# Altium PCB Copy of PCB.PcbDoc
Units mil, origin at the board's own origin, x right, y up, seen from the top; angles counter-clockwise.
Board outline 6000 x 4000 mil, 2 copper layers (Top Layer, Bottom Layer); 11 components, 7 nets, 36 pads, 0 vias.
Unrouted connection lines stored in the file: 27.
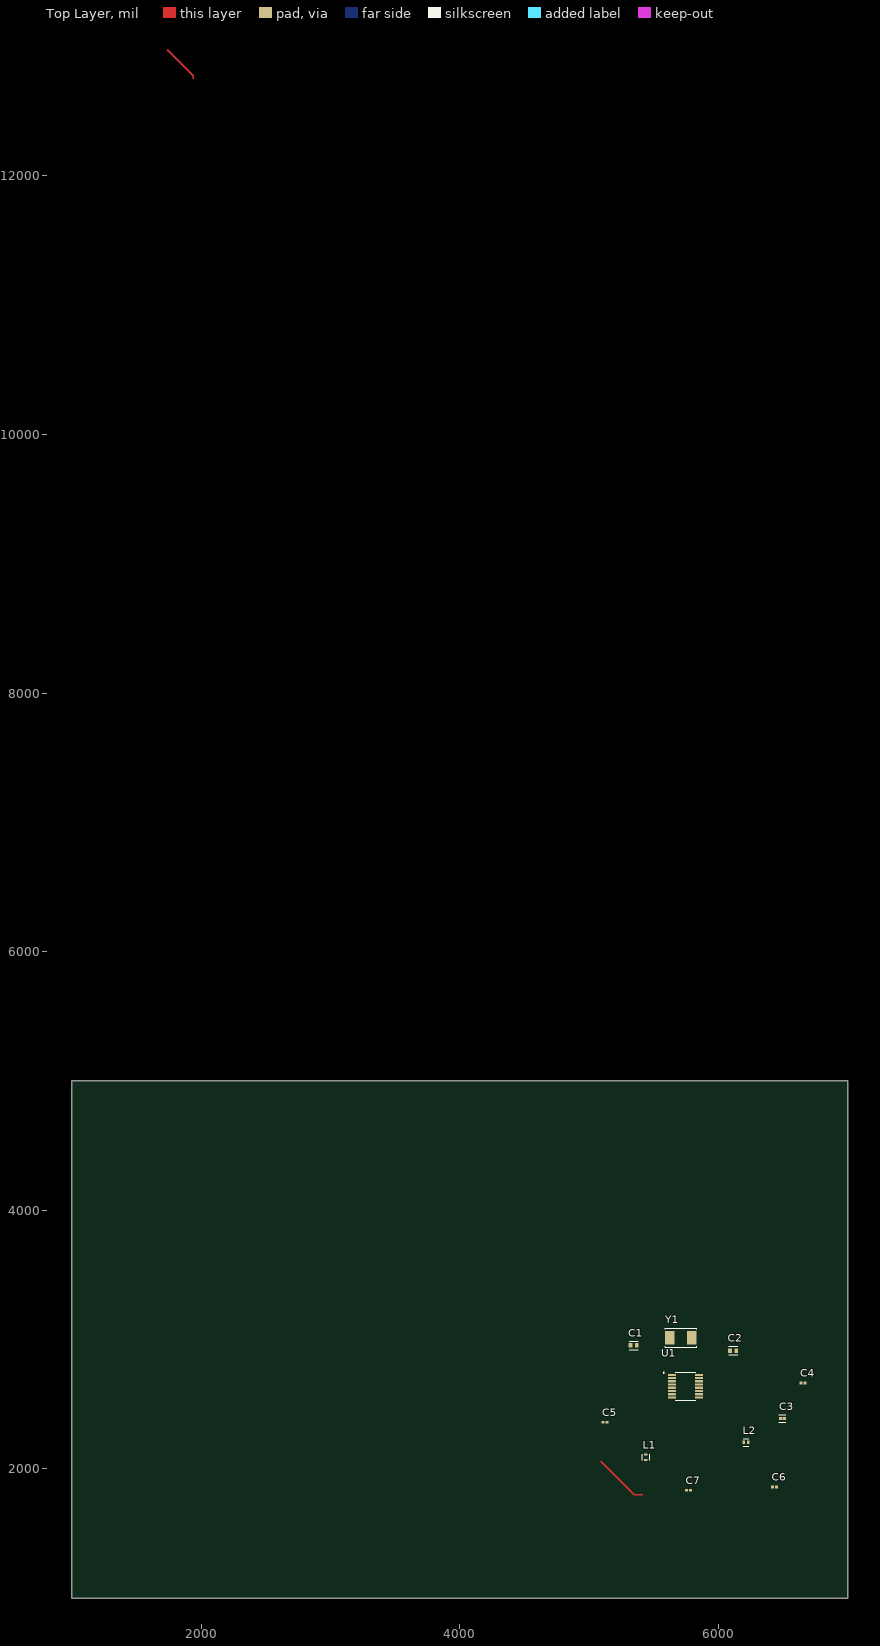
[diagram p0: Top Layer view]
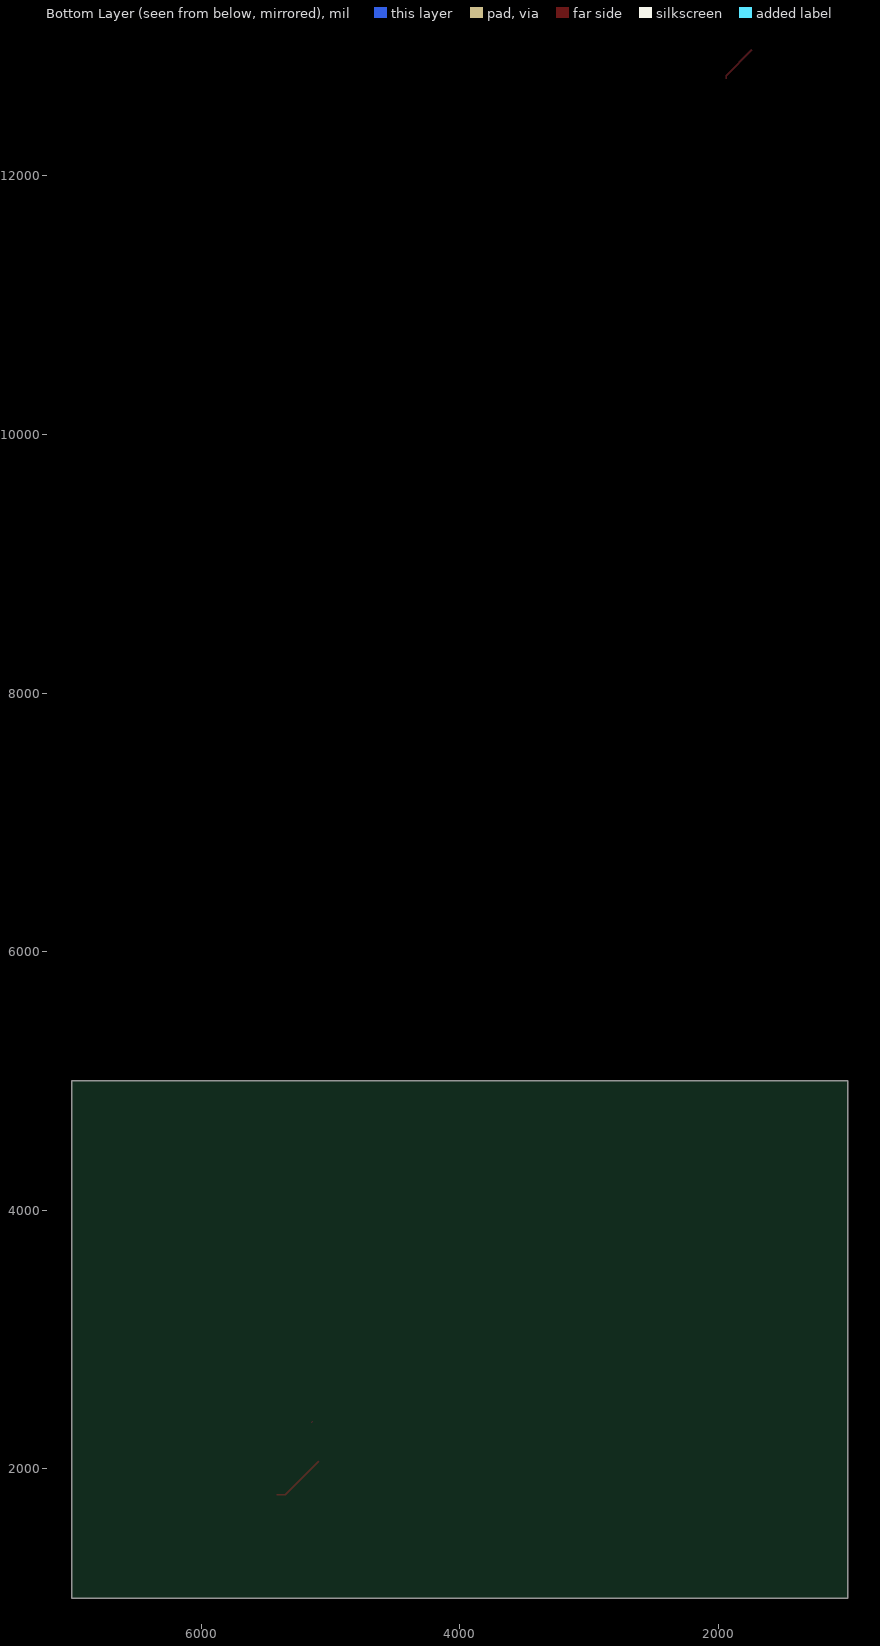
[diagram p1: Bottom Layer view, seen from below]

## Layer stack, top to bottom
Top Solder: solder mask 0.4, Solder Resist, Dk 3.5
Top Layer: signal copper 1.4
Dielectric 1: dielectric 12.6, FR-4, Dk 4.8
Bottom Layer: signal copper 1.4
Bottom Solder: solder mask 0.4, Solder Resist, Dk 3.5

## Board outline
1000,1000 7000,1000 7000,5000 1000,5000

## Design rules (kind name [scope] priority, off if disabled: settings)
Clearance [All] p1: gap=10 ignorepadtopadclearanceinfootprint=FALSE except(0: Arc-Hole Track-Hole SMDPad-Hole THPad-Hole Via-Hole Fill-Hole Poly-Hole Region-Hole Text-Hole)
PolygonConnect [All] p1: connectstyle=Relief reliefconductorwidth=10 reliefentries=4 polygonreliefangle="90 Angle" airgapwidth=10
RoomDefinition DaughterBoard [InComponentClass('DaughterBoard')] p1: confinementstyle=ConfineIn formatcopy=TRUE lockcomponents=FALSE outline 0,0 2000,0 2000,1000 0,1000
RoutingVias [All] p1: holewidth=28 width=50 viastyle="Through Hole" minholewidth=28 minwidth=50 maxholewidth=28 maxwidth=50
SolderMaskExpansion [All] p1: expansion=4 istentingtop=FALSE
Width [All] p1: maxlimit=10 minlimit=10 preferedwidth=10
30 further rules are at their usual default settings.

## Classes and differential pairs
net class ANT: ANT

## Components (designator, comment, footprint, x,y, rotation, side; value= is the part's Value field where it differs from the comment)
C1 "10pF" FP-C0603C-CF-MFG 5345,2955 r0 top value="10 pF"
C2 "10pF" FP-C0603C-CF-MFG 6115,2915 r0 top value="10 pF"
C3 "4.7uF" FP-C1005-050-0_15-IPC_C 6494.86,2390 r0 top
C4 "0.1uF" CAPC1005X56X25LL10T15 6655.35,2665 r0 top
C5 "0.1uF" CAPC1005X56X25LL10T15 5125,2360 r0 top
C6 "1.2pF" CAPC1005X55X25LL05T10 6434.65,1860 r0 top
C7 "1.2pF" CAPC1005X55X25LL05T10 5770.12,1835 r0 top
L1 "39nH" FP-LQW15AN_80-MFG 5440,2090 r90 top
L2 "77nH" FP-LQW15CN_10-MFG 6215,2205 r0 top
U1 "MICRF220AYQS" SOP63P600X175-16N 5745.12,2640 r0 top
Y1 "9.81563MHz" FP-ABM7-MFG 5710,3015 r0 top

## Footprints (in the part's own frame and the unit in brackets; to place one, negate y for a bottom-side part, rotate by r counter-clockwise, add the part's x,y. Pads: shape width x height; smd on the part's side, far side on the other; paste and mask are expansions set on the pad)
CAPC1005X55X25LL05T10 [mm] "Chip Capacitor, 2-Leads, Body 1.00x0.50mm, IPC High Density"
  rect 0.56x0.52 smd: 1(-0.39,0) 2(0.39,0)
  body extent -0.53,-0.28 0.53,0.28, height 0.55
CAPC1005X56X25LL10T15 [mm] "Chip Capacitor, 2-Leads, Body 1.00x0.50mm, IPC High Density"
  rect 0.58x0.54 smd: 1(-0.39,0) 2(0.39,0)
  body extent -0.55,-0.3 0.55,0.3, height 0.56
FP-ABM7-MFG [mm]
  rect 1.9x2.6 smd paste+0 mask+0: 1(-2.15,0) 2(2.15,0)
  silkscreen extent -3.1,-1.85 3.1,1.85, body extent -3.2,-1.95 3.2,1.95, height 0.25
FP-C0603C-CF-MFG [mm]
  rect 0.75x0.9 smd paste+0 mask+0: 1(-0.6,0) 2(0.6,0)
  silkscreen extent -0.87,-0.85 0.88,0.85, body extent -1.2,-0.6 1.2,0.6, height 0.25
FP-C1005-050-0_15-IPC_C [mil]
  rect 23.82x22.04 smd paste+0 mask+0: 1(-14.86,0) 2(14.86,0)
  silkscreen extent -27,-29 27,29, body extent -31,-17 31,17, height 10
FP-LQW15AN_80-MFG [mm]
  rect 0.41x0.66 smd paste+0 mask+0: 1(-0.505,0) 2(0.505,0)
  silkscreen extent -0.56,-0.74 0.55,0.75, body extent -0.81,-0.45 0.81,0.45, height 0.25
FP-LQW15CN_10-MFG [mm]
  rect 0.5x0.66 smd paste+0 mask+0: 1(-0.45,0) 2(0.45,0)
  silkscreen extent -0.55,-0.75 0.55,0.75, body extent -0.8,-0.43 0.8,0.43, height 0.25
SOP63P600X175-16N [mm]
  rrect25% 1.57x0.41 smd: 1(-2.67,2.222) 2(-2.67,1.587) 3(-2.67,0.953) 4(-2.67,0.318) 5(-2.67,-0.318) 6(-2.67,-0.953) 7(-2.67,-1.587) 8(-2.67,-2.222) 9(2.67,-2.222) 10(2.67,-1.587) 11(2.67,-0.953) 12(2.67,-0.318) 13(2.67,0.318) 14(2.67,0.953) 15(2.67,1.587) 16(2.67,2.222)
  silkscreen extent -4.34,-2.75 2,2.75, body extent -5,-5 5,5, height 142

## Part data
C1 C2: library part CMP-1035-00555-3, "CAP CER 10PF 50V NP0 0603", Capacitance="10 pF", Manufacturer=KEMET, Manufacturer Part Number=C0603C100D5GACTU, Package=C0603C-CF, Temperature="-55°C to +125°C", Temperature Characteristic=C0G, Temperature Coefficient=30ppm/°C, Temperature Range High=+125°C, Temperature Range Low=-55°C, Tolerance="0.5 pF", Voltage Rating="50 V", Automotive=Yes, Automotive Grade="Grade 1", Category=Cap, ComponentLink2Description=Datasheet, ComponentLink2URL=https://api.kemet.com/component-edge/download/datasheet/C0603C100J5GACAUTO.pdf, Device Class L1="Passive Components", Device Class L2=Capacitors, Device Class L3="Ceramic Capacitors", Digikey Description="CAP CER 10PF 50V NP0 0603", Height=0.87mm, Lead Free=Yes, Material=Ceramic, Mouser Description="Multilayer Ceramic Capacitors MLCC - SMD/SMT 50volts 10pF C0G 0.5%", Octopart=https://octopart.com/c0603c100d5gactu-kemet-9143648, RoHS=TRUE
C3: library part CMP-08246-005457-1, "CAP CER 4.7UF 6.3V X5R 0402", Case Code (Imperial)=0402, Case Code (Metric)=1005, Dielectric=X5R, Dielectric Material=Ceramic, Max Operating Temperature=85°C, Min Operating Temperature=-55°C, Package Quantity=1, Tolerance=20%, Voltage=6.3V, Capacitance=4.7uF, Case/Package=0402, Construction=Flat, Depth=0.5mm, Dissipation Factor=10%, Height=0.5mm, Lead Free="Lead Free", Length=1mm, Mount="Surface Mount", Packaging="Tape and Reel", Radiation Hardening=No, REACH SVHC="No SVHC", Resistor Type=Ceramic, Series=C, Termination=SMD/SMT, Thickness=0.026inch, Voltage Rating=6.3V, Voltage Rating (DC)=6.3V, Weight=2.3E-05oz, Width=0.02inch
C4 C5: library part CMP-2008-02743-1, Manufacturer="AVX Interconnect / Elco", Part Number=04026D104KAT2A
C6 C7: library part CMP-1034-00083-2, Manufacturer=Murata, Part Number=GRM1555C1H1R2WA01D
L1: library part CMP-06042-001660-1, "Wire Wound RF Inductor 39nH ±5% 530mA 0.456Ω 0402 (1005)", Case Code (Imperial)=0402, Case Code (Metric)=1005, Current Rating=530mA, DC Resistance (DCR)=456mR, Max Operating Temperature=125°C, Min Operating Temperature=-55°C, Package Quantity=1, Resistor Type=Wirewound, Self Resonant Frequency=3.4GHz, Test Frequency=100MHz, Tolerance=5%, Case/Package=0402, Core Material=Non-Magnetic, Height=0.5mm, Height - Seated (Max)=0.024inch, Inductance=39nH, Length=0.039inch, Max DC Current=530mA, Mount="Surface Mount", Packaging="Tape and Reel", Q Factor=28, Shielding=Unshielded, Termination=SMD/SMT, Width=0.024inch
L2: library part CMP-06042-006679-1, "Wire Wound Ferrite RF Inductor For Automotive 77nH ±5% 1100mA 0.09Ω 0402 (1005)", Case Code (Imperial)=0402, Case Code (Metric)=1005, Current Rating=1.1A, DC Resistance (DCR)=90mR, Max Operating Temperature=125°C, Min Operating Temperature=-40°C, Ratings=AEC-Q200, Resistor Type=Wirewound, Self Resonant Frequency=2GHz, Test Frequency=100MHz, Tolerance=5%, Case/Package=0402, Core Material=Ferrite, Height - Seated (Max)=0.024inch, Inductance=77nH, Length=0.039inch, Mount="Surface Mount", Packaging="Tape and Reel", Shielding=Unshielded, Width=0.02inch
U1: "No Description Available", Mfr_Name=Microchip, Copyright="Copyright (C) 2022 Ultra Librarian. All rights reserved.", Manufacturer_Part_Number=MICRF220AYQS, RefDes=RefDes, Type=DEV
Y1: library part CMP-27762-013605-1, "Crystal 9.81563MHz ±30ppm 10pF SMD-2 6mm x 3.5mm", Case/Package=SMD/SMT, ESR (Equivalent Series Resistance)=50R, Frequency Stability=100ppm, Frequency Tolerance=30ppm, Load Capacitance=10pF, Max Operating Temperature=85°C, Min Operating Temperature=-40°C, Frequency=9.81563MHz, Height=0.055inch, Length=0.236inch, Mount="Surface Mount", Packaging="Tape and Reel", Width=0.138inch

## Nets (pads, with @x,y where several pads share a name; then routed paths per layer and width w, separated by ;. In a path a pad name is that pad's centre, name@x,y a point inside that pad or via, vN(x,y) a via of type N, cw(c..) or ccw(c..) an arc to the next point about the centre after c; other vN are vias at no path point)
ANT: C1.1 C2.2 C3.2 C4.2 C5.2 C6.1 C6.2 C7.1 C7.2 L1.1 L1.2 L2.1 L2.2 U1.2 U1.3 U1.4 U1.6 U1.7 U1.8 U1.9 U1.11 | length 6.9
  Top Layer w10: C5.2 5140.35,2360.35 C5.2@5145,2365
CAFGC: C3.1 U1.13
CTH: C4.1 U1.12
RO1: C1.2 U1.1 Y1.1
RO2: C2.1 U1.16 Y1.2
VDD: C5.1 U1.5
"":  | length 307.8
  Top Layer w10: 1740,12975 1940,12775 1940,12750
pads on no net: U1.10 U1.14 U1.15
copper on no net: | length 432.7
  Top Layer w10: 5090,2060 5350,1800 5415,1800